# Altium PCB AC to DC(12V).PcbDoc
Units mil, origin at the board's own origin, x right, y up, seen from the top; angles counter-clockwise.
Board outline 3210 x 4000 mil, 4 copper layers (Top Layer, Layer 1, Layer 2, Bottom Layer), stack 23.756 mil thick; 33 components, 22 nets, 87 pads, 0 vias.
Unrouted connection lines stored in the file: 3.
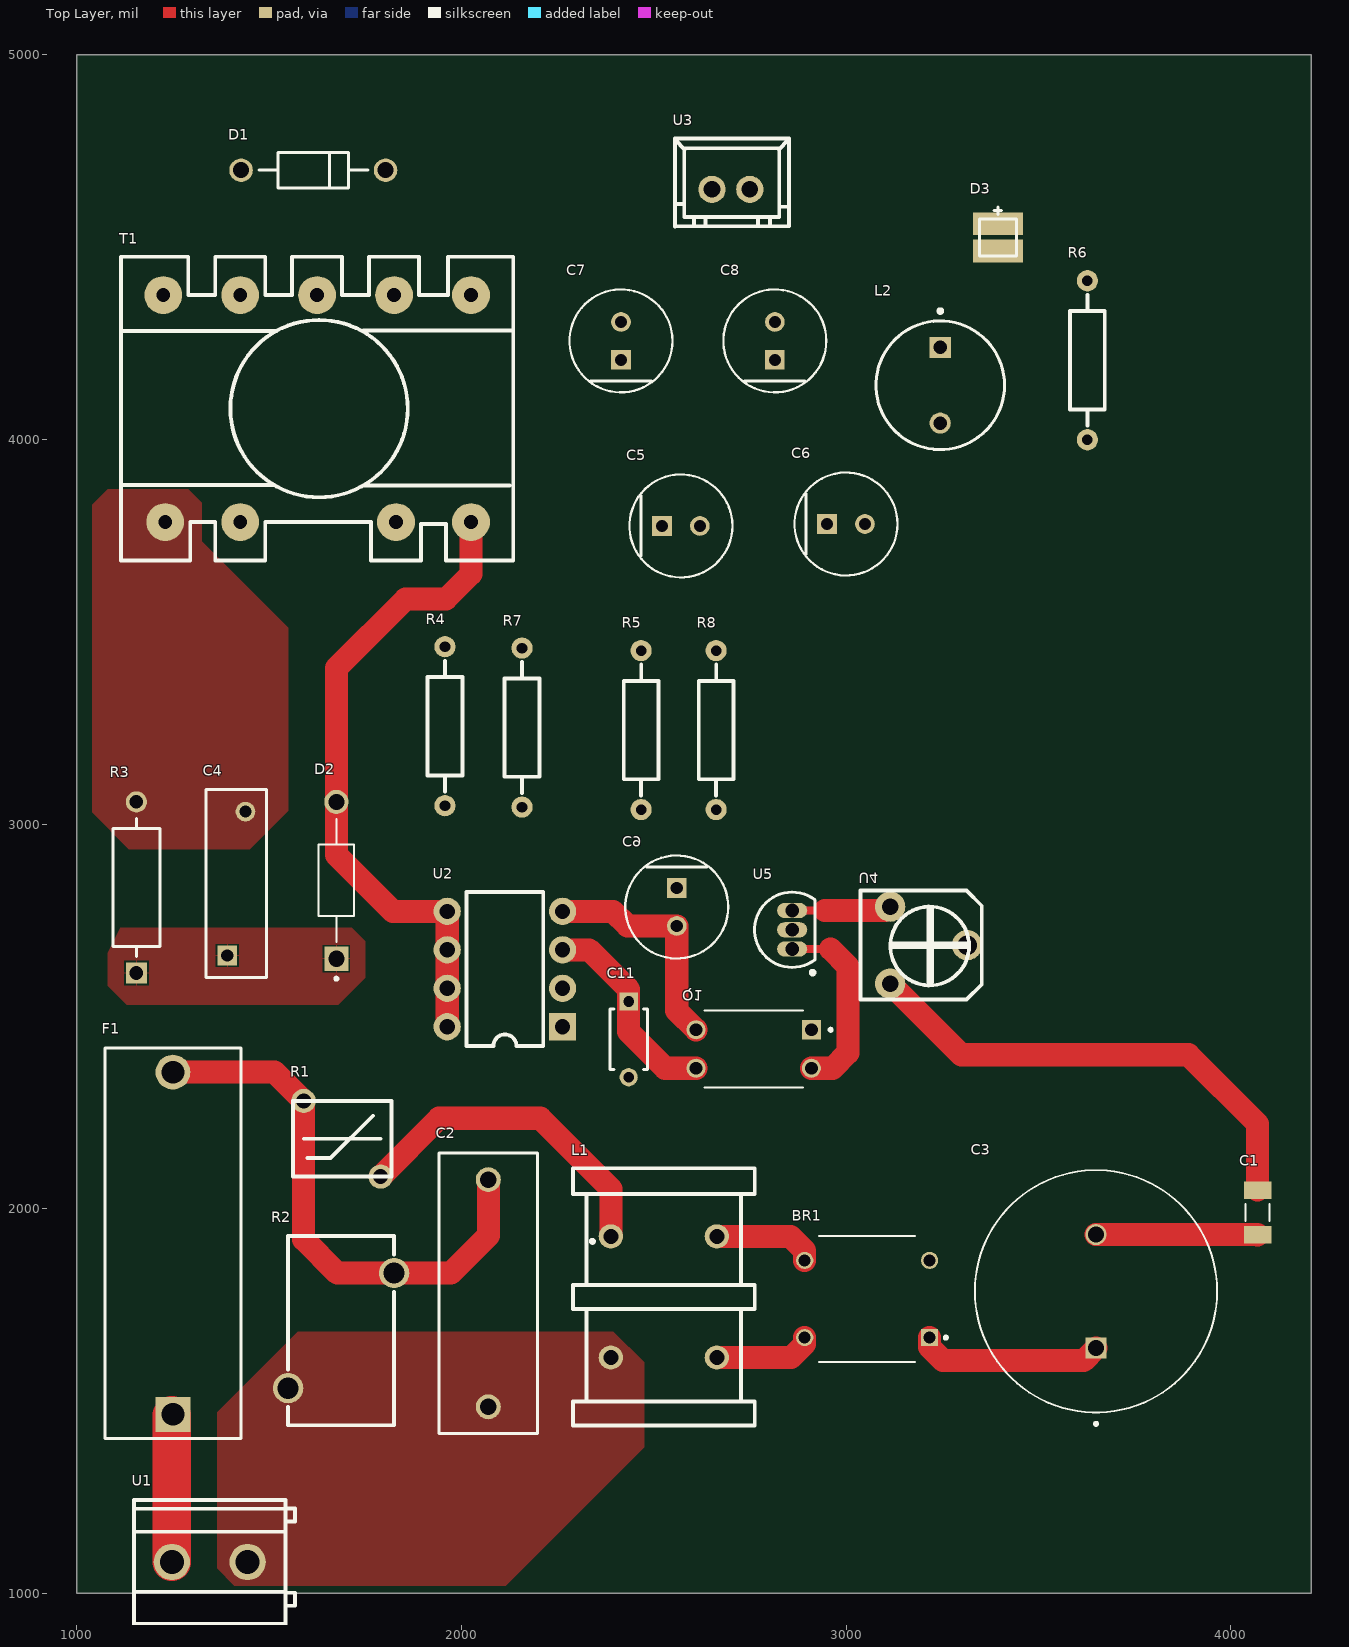
[diagram p0: Top Layer view]
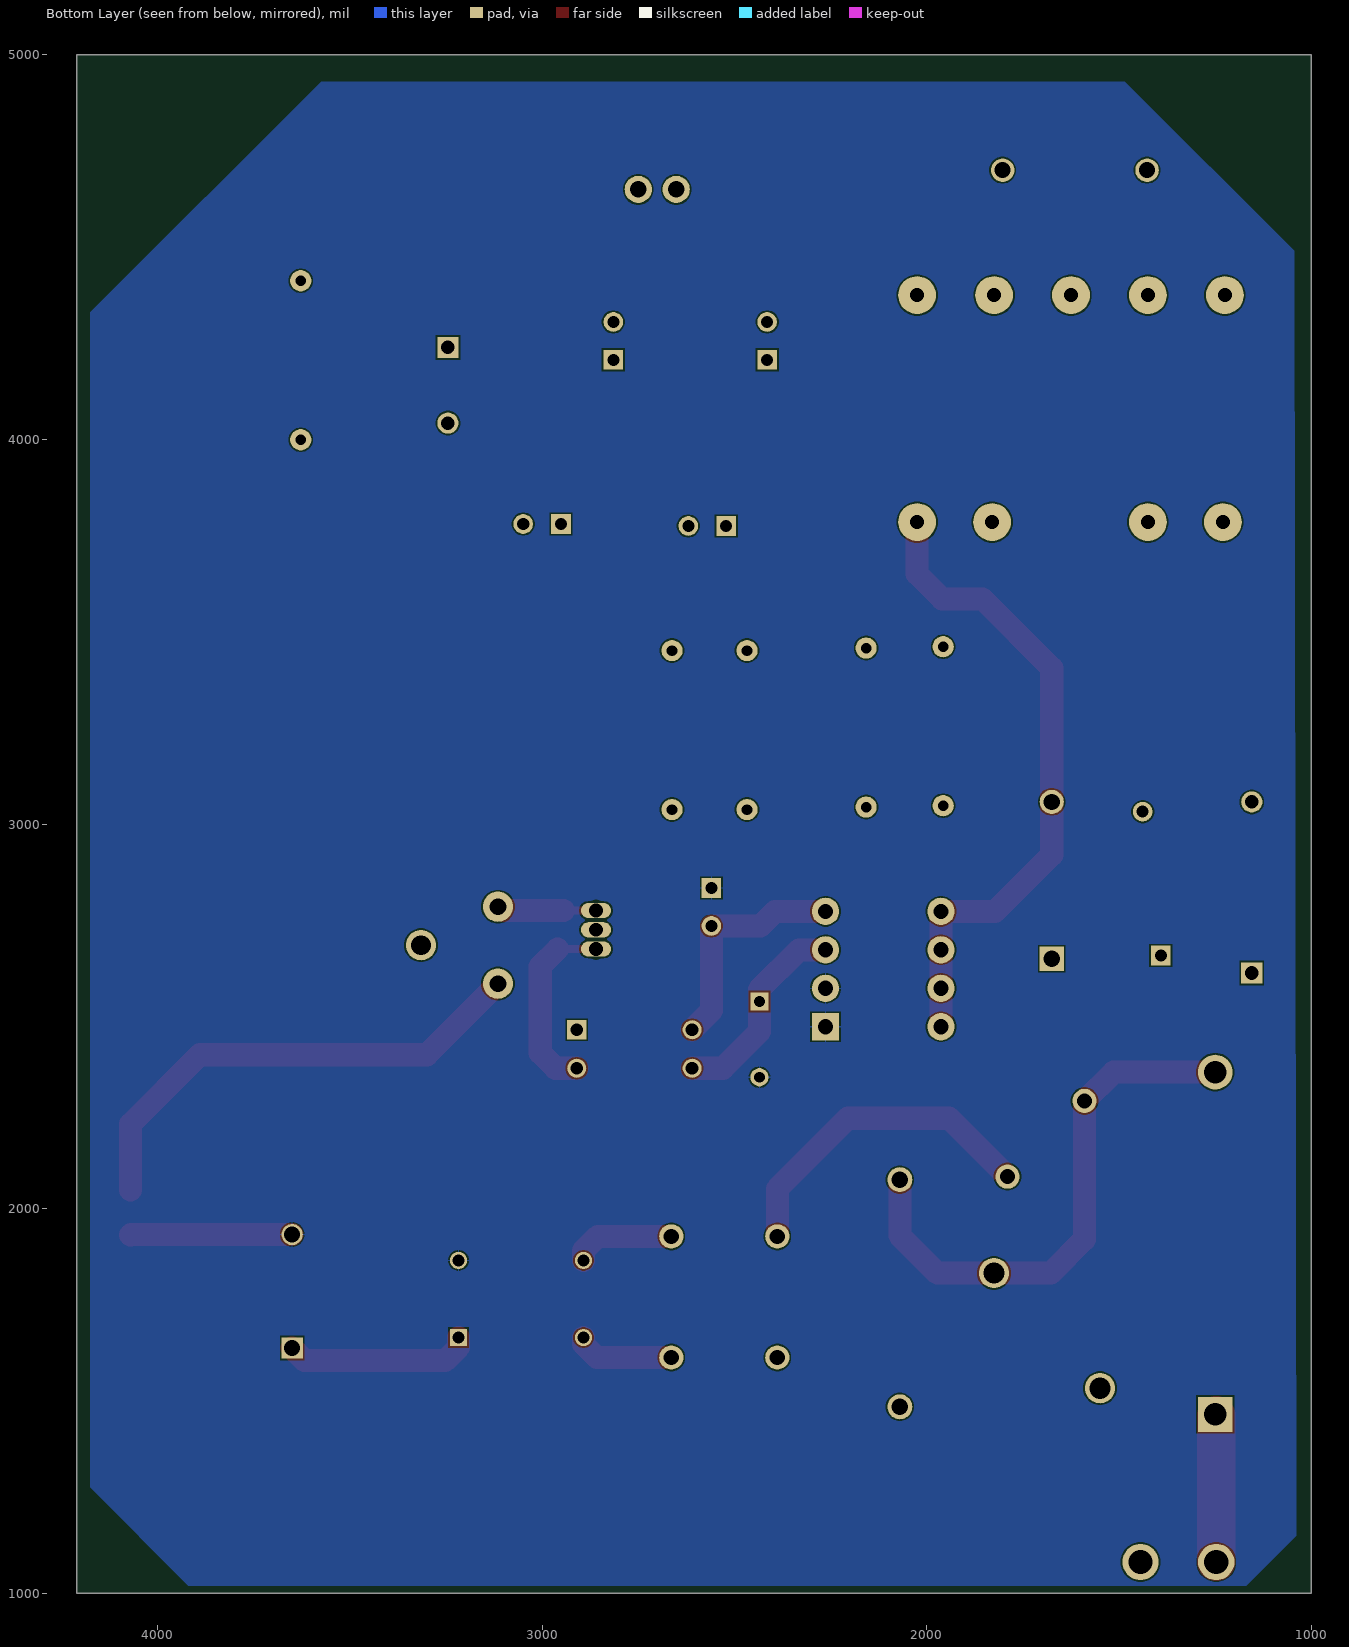
[diagram p1: Bottom Layer view, seen from below]
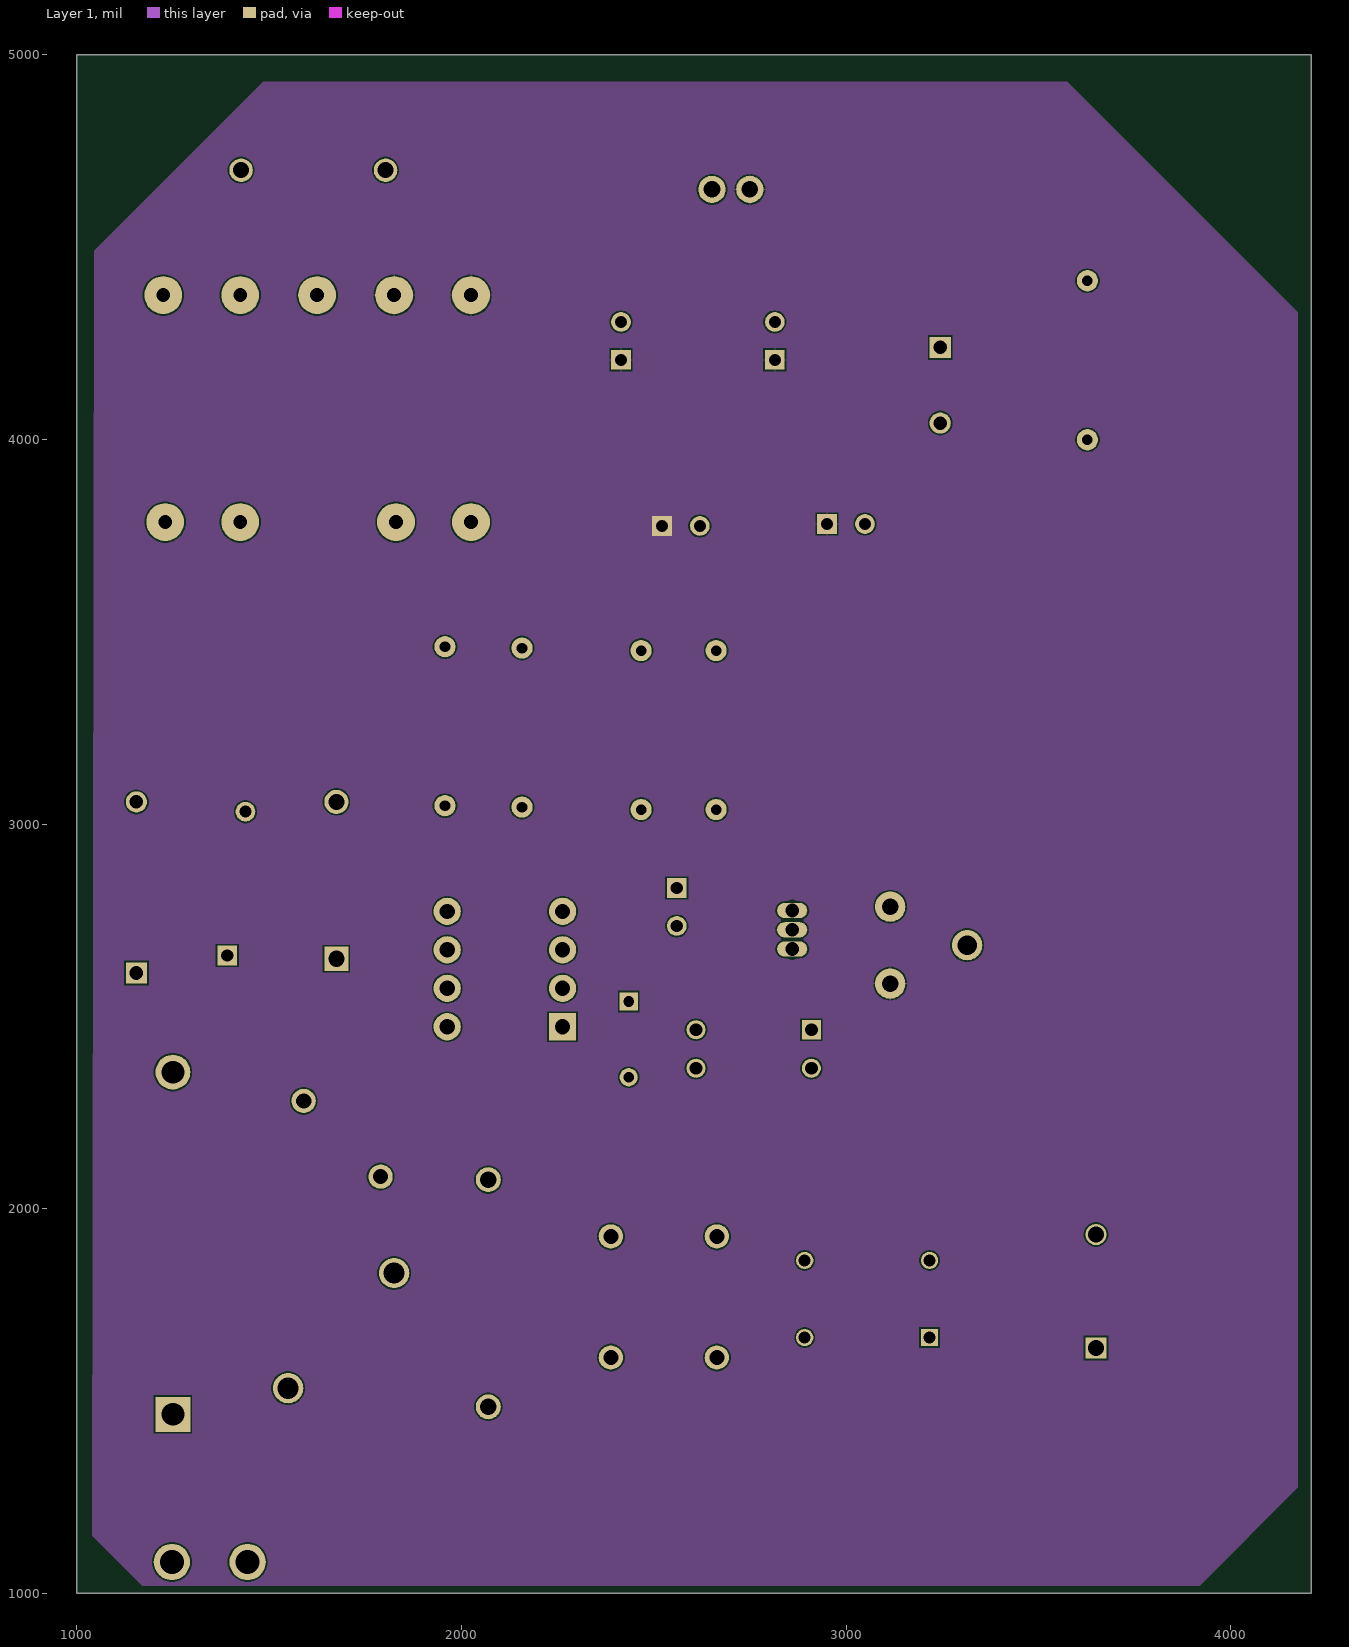
[diagram p2: Layer 1]
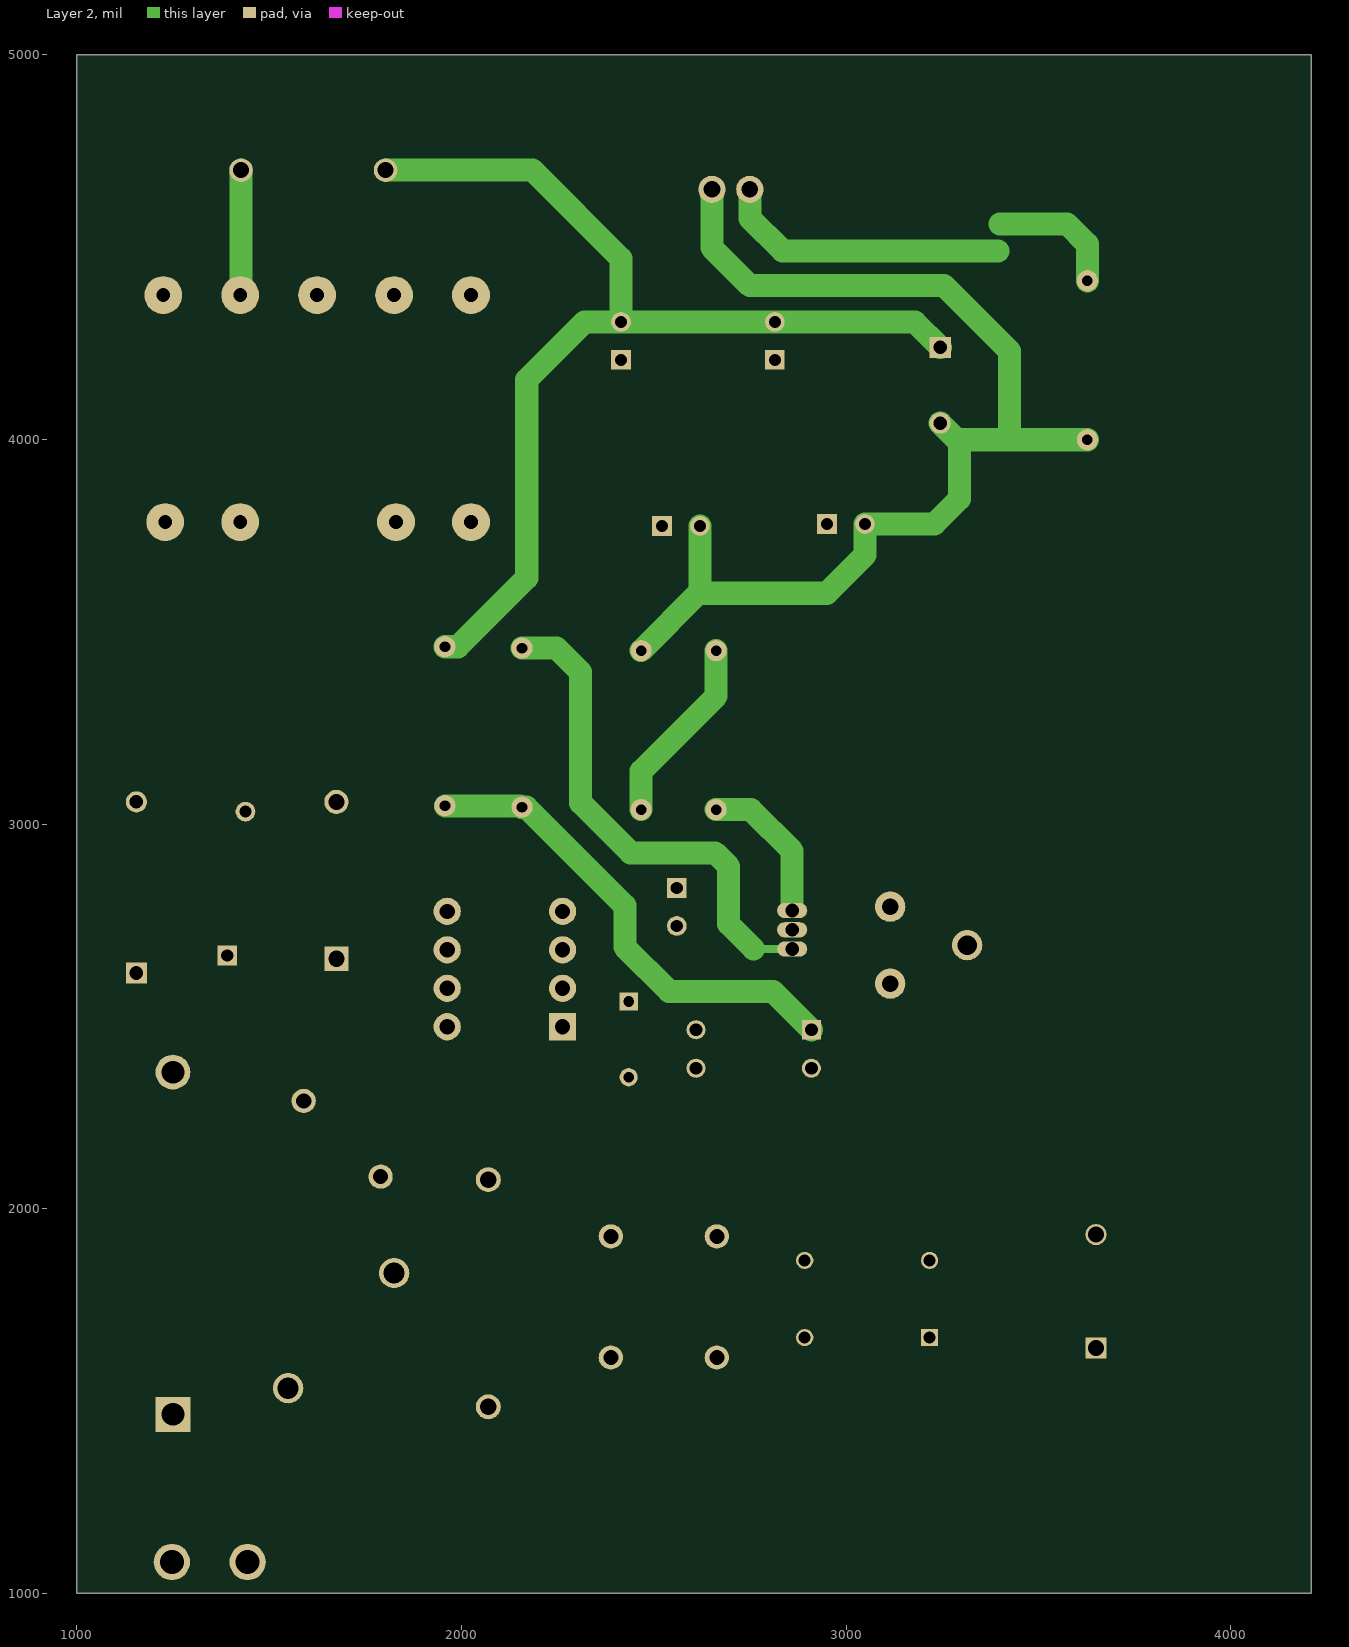
[diagram p3: Layer 2]
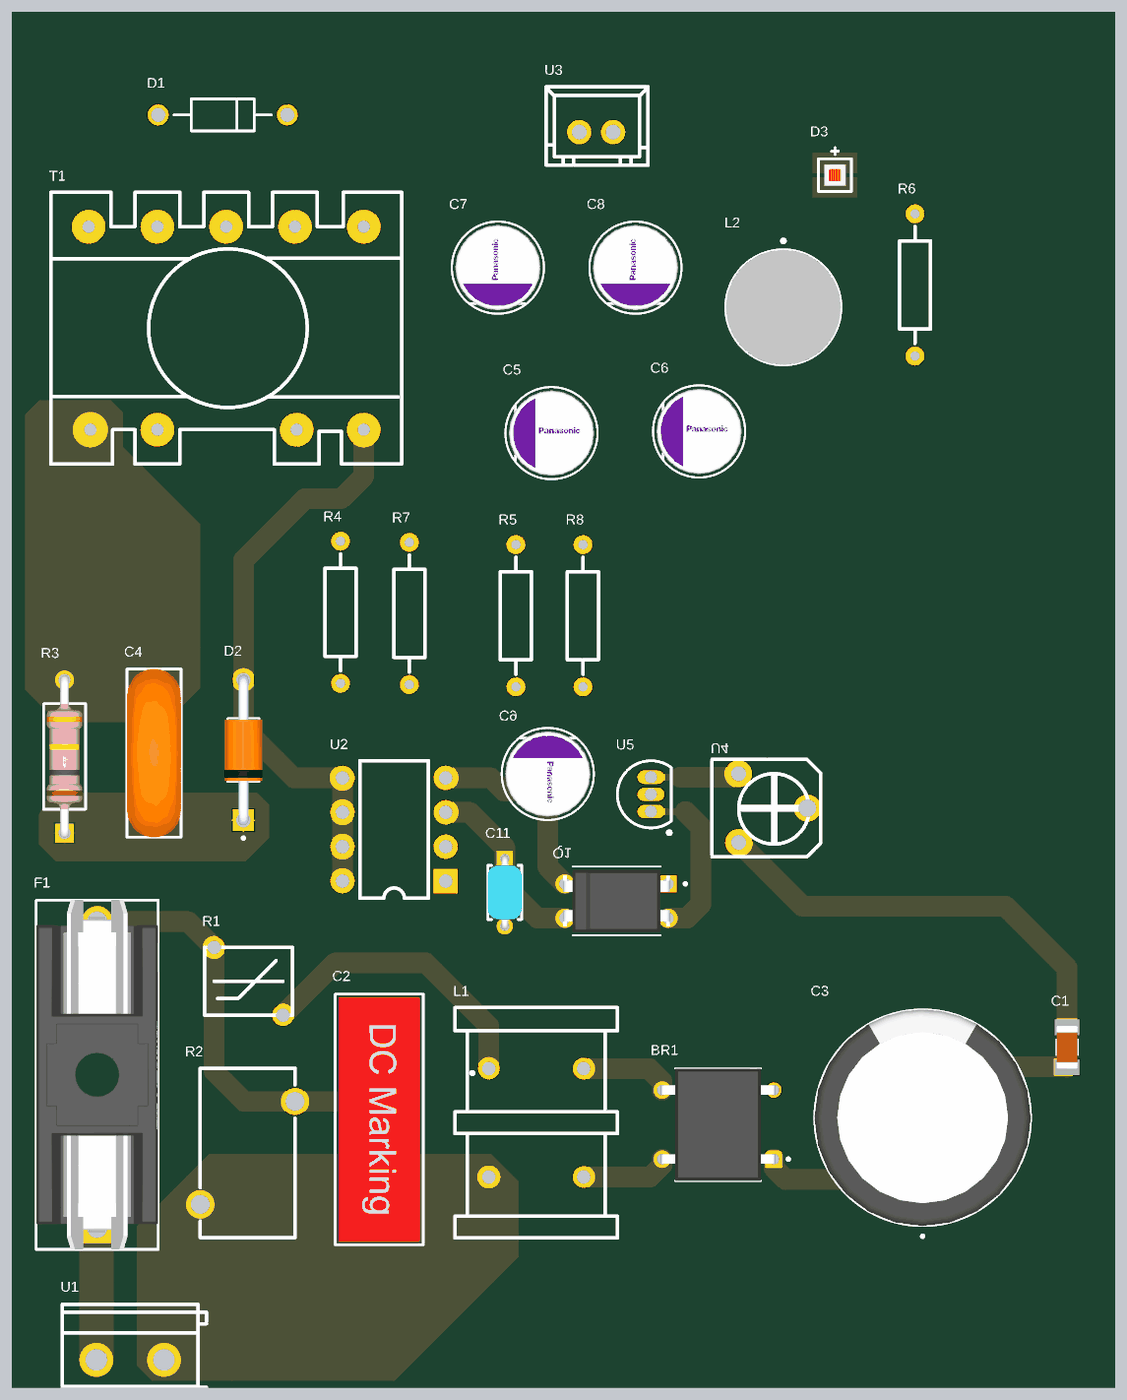
[diagram p4: 3D render of the assembled board from above, using the file's embedded part models]

## Layer stack, top to bottom
Top Solder: solder mask 0.4, Solder Resist, Dk 3.5
Top Layer: signal copper 1.4
Dielectric 2: prepreg 2.8, PP-006, Dk 4.1
Layer 1: signal copper 1.378
Dielectric 1: dielectric 12.6, FR-4, Dk 4.8
Layer 2: signal copper 1.378
Dielectric 3: prepreg 2.8, PP-006, Dk 4.1
Bottom Layer: signal copper 1.4
Bottom Solder: solder mask 0.4, Solder Resist, Dk 3.5

## Board outline
1000,1000 4210,1000 4210,5000 1000,5000

## Design rules (kind name [scope] priority, off if disabled: settings)
BoardOutlineClearance [All] p1: gap=7.87 ignorepadtopadclearanceinfootprint=FALSE
Clearance [All] p1: gap=4 ignorepadtopadclearanceinfootprint=FALSE except(5: Arc-Via Track-Via SMDPad-Via THPad-Via Via-Via Via-Fill Via-Poly Via-Region Via-Text; 9.84: Arc-Hole Track-Hole SMDPad-Hole THPad-Hole Via-Hole Fill-Hole Poly-Hole Region-Hole Text-Hole)
ComponentClearance [All] p1: gap=4 collisioncheckmode=3 verticalgap=4 showdistances=TRUE
DiffPairsRouting [All] p1: maxlimit=4 minlimit=4 mostfreqgap=4 toplayer_minwidth=4 toplayer_maxwidth=71497.94 toplayer_prefwidth=4 midlayer1_minwidth=4 midlayer1_maxwidth=71497.94 midlayer1_prefwidth=4 midlayer2_minwidth=4 midlayer2_maxwidth=71497.94 midlayer2_prefwidth=4 bottomlayer_minwidth=4 bottomlayer_maxwidth=71497.94 bottomlayer_prefwidth=4 maxuncoupledlength=500
Height [All] p1: minheight=0 maxheight=71497.94 prefheight=500
HoleSize [All] p1: absolutevalues=TRUE maxlimit=248.03 minlimit=7.87 maxpercent=80.000 minpercent=20.000
HoleToHoleClearance [All] p1: gap=9.84 allowstackedmicrovias=FALSE
MinimumAnnularRing [All] p1: minimumring=3
MinimumSolderMaskSliver [All] p1: minsoldermaskwidth=0
PlaneClearance [All] p1: clearance=4
PlaneConnect PlaneConnectPowerPads [InPadClass('PowerPads')] p1: planeconnectstyle=Direct reliefexpansion=20 reliefentries=4 reliefconductorwidth=10 reliefairgap=10
PlaneConnect [All] p2: pad.planeconnectstyle=Relief pad.reliefexpansion=11.81 pad.reliefentries=4 pad.reliefconductorwidth=4 pad.reliefairgap=4 via.planeconnectstyle=Direct via.reliefexpansion=11.81 via.reliefentries=4 via.reliefconductorwidth=5 via.reliefairgap=5
PolygonConnect PolygonConnectPowerPads [All vs (InPadClass('PowerPads'))] p1: connectstyle=Direct reliefconductorwidth=10 reliefentries=4 polygonreliefangle="90 Angle" airgapwidth=10
PolygonConnect [All] p2: thpad.connectstyle=Relief thpad.reliefconductorwidth=4 thpad.reliefentries=4 thpad.polygonreliefangle="90 Angle" thpad.airgapwidth=4 smdpad.connectstyle=Relief smdpad.reliefconductorwidth=4 smdpad.reliefentries=4 smdpad.polygonreliefangle="90 Angle" smdpad.airgapwidth=4 via.connectstyle=Direct via.reliefconductorwidth=5 via.reliefentries=4 via.polygonreliefangle="90 Angle" via.airgapwidth=5
RoutingVias [All] p1: holewidth=7.87 width=17.72 viastyle="Through Hole" minholewidth=7.87 minwidth=17.72 maxholewidth=248.03 maxwidth=257.87
SilkToSilkClearance [All] p1: silktosilkclearance=0
SilkToSolderMaskClearance [IsPad] p1: minsilkscreentomaskgap=4 clearancetoexposedcopper=TRUE
SolderMaskExpansion [All] p1: expansion=2.95 istentingtop=FALSE
Width [All] p1: maxlimit=71497.94 minlimit=4 preferedwidth=4
20 further rules are at their usual default settings.

## Components (designator, comment, footprint, x,y, rotation, side; value= is the part's Value field where it differs from the comment)
BR1 "DB107-BP" DIP825W50P509L880H320Q4 3055,1765 r180 top
C1 "2200pF  (1kV)" CAPC3216X94N 4070,1990 r90 top
C2 "100nF 275Vac" WCAP-FTX2_L18W6H12_CS 2070,1780 r270 top
C3 "22uF 450V" CAPPRD750W80D1600H2500 3650,1785 r90 top
C4 "10000PF 1KV" FP-562R5GAS10-MFG 1415,2845 r90 top
C5 "100UF 16V" FP-OS-CON-TH-C9-d_0_6-MFG 2570.79,3775 r0 top
C6 "100UF 16V" FP-OS-CON-TH-C9-d_0_6-MFG 3000,3780 r0 top
C7 "100UF 16V" FP-OS-CON-TH-C9-d_0_6-MFG 2415,4256.02 r90 top
C8 "100UF 16V" FP-OS-CON-TH-C9-d_0_6-MFG 2815,4256.02 r90 top
C9 "100UF 16V" FP-OS-CON-TH-C9-d_0_6-MFG 2560,2784.21 r270 top
C10 "0.1uF 50V" WCAP-ATG8_D5H11 0,2290 r0 top
C11 "10nF 50V\" FP-RCE1K1-2_5-MFG 2435,2440 r270 top
D1 "MBR160RLG" ONSC-AXIAL_LEAD-2-59-10_P 1615,4700 r180 top
D2 "FR107G" DIOAD1036W78L470D235 1675,2853.64 r90 top
D3 "XQERED-H2-0000-000000301" FP-XQE-MFG 3395,4525 r90 top
F1 "64600001223" FP-64600001223-MFG 1250,1910 r90 top
L1 "UU9.8-10mH" "CMC 10mH" 2530,1770 r180 top
L2 "RL622-100K-RC" INDR62-500-1100X850X1100 3245,4140.76 r270 top
Q1 "PC817C" DIP762W50P254L650H458Q4B 2760,2415 r180 top
R1 "MF72 10D7_C72680" "NTC thermistor" 1559.69,2061.66 r0 top value=Power
R2 "10D561K_C233178" varistor 1690,1685 r270 top value=Shenzhen
R3 "100K OHM 1W" FP-RR01-MFG 1155,2835 r90 top
R4 "2.2KΩ" CF1/4W-2.2K 1965,3240 r90 top value=2.2kΩ
R5 "18KΩ" CF1/4W-2.2K 2475,3230 r90 top value=2.2kΩ
R6 "CF1/4W-1.5KΩ" CF1/4W-2.2K 3620,4220 r270 top value=2.2kΩ
R7 "4.7KΩ" CF1/4W-2.2K 2150,3265 r270 top value=2.2kΩ
R8 "3.9KΩ" CF1/4W-2.2K 2670,3230 r90 top value=2.2kΩ
T1 "EE25" EE25 1640,4085 r90 top
U1 "Green Connector-2P" KF127-5.0-2P 1340,1090 r180 top
U2 "DK124" "AC-DC controller" 2100,2627.87 r90 top
U3 "XH-2PA" "XH-2PA white connector" 2710.75,4726.57 r0 top
U4 "Trimmer(1K)" "trimmer 1K" 3042.83,2543.27 r90 top value=1kΩ
U5 "TL431CZ-AP" TO-92 2860,2725 r0 top

## Footprints (in the part's own frame and the unit in brackets; to place one, negate y for a bottom-side part, rotate by r counter-clockwise, add the part's x,y. Pads: shape width x height; smd on the part's side, far side on the other; paste and mask are expansions set on the pad)
"AC-DC controller" [mm]
  rect 1.8x1.8 hole 1 paste-2539.97 mask+0.05: 1(-3.937,-4.145)
  round 1.8 hole 1 paste-2539.97 mask+0.05: 2(-1.397,-4.145) 3(1.143,-4.145) 4(3.683,-4.145) 5(3.683,3.475) 6(1.143,3.475) 7(-1.397,3.475) 8(-3.937,3.475)
  silkscreen extent -5.21,-2.87 4.95,2.2
CAPC3216X94N [mm]
  rect 1.16x1.82 smd: 1(-1.475,0) 2(1.475,0)
  silkscreen extent -0.57,-0.8 0.57,0.8, body extent -1.6,-0.8 1.6,0.8, height 1.78
CAPPRD750W80D1600H2500 [mm]
  round 1.4 hole 1.05: N(3.75,0)
  rect 1.4x1.4 hole 1.05: P(-3.75,0)
  silkscreen extent -8.85,-8 8,8, body extent -8,-8 8,8, height 25
CF1/4W-2.2K [mm]
  round 1.4 hole 0.7 paste-2539.97 mask+0.051: 1(-4.888,0.194) 2(5.612,0.194)
  silkscreen extent -3.96,-0.96 4.68,1.34
"CMC 10mH" [mm]
  round 1.6 hole 1 paste-2539.97 mask+0.051: 1(3.591,-4.009) 2(-3.409,-4.009) 3(-3.409,3.991) 4(3.591,3.991)
  silkscreen extent -5.91,-8.51 6.09,8.49
DIOAD1036W78L470D235 [mm]
  round 1.59 hole 1.06: A(5.18,0)
  rect 1.59x1.59 hole 1.06: C(-5.18,0)
  silkscreen extent -6.6,-1.17 4.07,1.17, body extent -5.55,-1.4 5.55,1.4, height 2.8
DIP762W50P254L650H458Q4B [mm]
  rect 1.26x1.26 hole 0.85: 1(-3.81,-1.27)
  round 1.26 hole 0.85: 2(-3.81,1.27) 3(3.81,1.27) 4(3.81,-1.27)
  silkscreen extent -5.18,-2.54 3.25,2.54, body extent -3.94,-2.29 3.94,2.29, height 4.8
DIP825W50P509L880H320Q4 [mm]
  rect 1.14x1.14 hole 0.79: 1(-4.125,2.55)
  round 1.14 hole 0.79: 2(-4.125,-2.55) 3(4.125,-2.55) 4(4.125,2.55)
  silkscreen extent -5.3,-4.15 3.18,4.15, body extent -4.2,-4.14 4.2,4.14, height 3.3
EE25 [mil]
  round 98.42 hole 36 paste-99999 mask+2: 1(-300,-385) 2(-300,-190) 3(-300,215) 4(-300,410) 5(290,-385) 6(290,-185) 7(290,15) 8(290,215) 9(290,415)
  silkscreen extent -400,-495 390,525
FP-562R5GAS10-MFG [mm]
  rect 1.3x1.3 hole 0.8 paste-2539.97 mask+0: 1(-4.75,0.6)
  round 1.3 hole 0.8 paste-2539.97 mask+0: 2(4.75,-0.6)
  silkscreen extent -6.2,-2 6.2,2, body extent -6.3,-2.1 6.3,2.1, height 0.25
FP-64600001223-MFG [mm]
  rect 2.3x2.3 hole 1.5 paste-2539.97 mask+0: 1(-11.3,0)
  round 2.3 hole 1.5 paste-2539.97 mask+0: 2(11.3,0)
  silkscreen extent -12.9,-4.5 12.9,4.5, body extent -13,-4.6 13,4.6, height 0.25
FP-OS-CON-TH-C9-d_0_6-MFG [mm]
  rect 1.3x1.3 hole 0.8 paste-2539.97 mask+0: 1(-1.25,0)
  round 1.3 hole 0.8 paste-2539.97 mask+0: 2(1.25,0)
  silkscreen extent -3.4,-3.4 3.4,3.4, body extent -3.5,-3.5 3.5,3.5, height 0.25
FP-RCE1K1-2_5-MFG [mm]
  rect 1.2x1.2 hole 0.7 paste-2539.97 mask+0: 1(-2.5,0)
  round 1.2 hole 0.7 paste-2539.97 mask+0: 2(2.5,0)
  silkscreen extent -2,-1.25 2,1.25, body extent -3.2,-1.35 3.2,1.35, height 0.25
FP-RR01-MFG [mm]
  rect 1.4x1.4 hole 0.9 paste-2539.97 mask+0: 1(-5.65,0)
  round 1.4 hole 0.9 paste-2539.97 mask+0: 2(5.65,0)
  silkscreen extent -4.55,-1.55 4.55,1.55, body extent -6.45,-1.65 6.45,1.65, height 0.25
FP-XQE-MFG [mm]
  rect 1.5x3.3 smd paste-1000 mask-1000: 1(-0.9,0) 2(0.9,0)
  silkscreen extent -1.21,-1.21 2.02,1.21, body extent -1.75,-1.75 1.75,1.75, height 0.25
INDR62-500-1100X850X1100 [mm] "THD, 2-Leads, Dia 8.5mm, Pitch 5mm"
  rect 1.4x1.4 hole 0.9 unplated: 1(-2.5,0)
  round 1.4 hole 0.9 unplated: 2(2.5,0)
  silkscreen extent -5.02,-4.25 4.25,4.25, body extent -4.25,-4.25 4.25,4.25, height 11
KF127-5.0-2P [mm]
  round 2.4 hole 1.6 paste-2539.97 mask+0.051: 1(-2.647,0.223) 2(2.353,0.223)
  silkscreen extent -5.78,-3.88 4.85,4.32
"NTC thermistor" [mm]
  round 1.6 hole 1 paste-2539.97 mask+0.051: 1(0.77,5.546) 2(5.85,0.546)
  silkscreen extent 0.06,0.55 6.56,5.55
ONSC-AXIAL_LEAD-2-59-10_P [mm] "AXIAL, 2-Leads, Diameter 2.35mm"
  round 1.55 hole 1.05: 1(-4.77,0) 2(4.77,0)
  silkscreen extent -3.59,-1.17 3.59,1.17
TO-92 [mm] "TO, Flat Index; 3 In-Line, Axial Leads; Body Dia. 4.7mm; Lead Dia. 0.56 mm (max)"
  oval 2x1 hole 0.9: 1(0,-1.27) 2(0,0) 3(0,1.27)
  silkscreen extent -2.48,-2.95 1.5,2.48, body extent -2.48,-2.5 1.5,2.5, height 4.95
"trimmer 1K" [mm]
  round 2 hole 1.1 paste-2539.97 mask+0.051: 1(1.06,-1.833) 3(6.14,-1.833)
  round 2 hole 1.3 paste-2539.97 mask+0.051: 2(3.6,-6.913)
  silkscreen extent 0,-7.87 7.2,0.13
varistor [mm]
  round 2 hole 1.4 paste-2539.97 mask+0.051: 1(3.857,-3.567) 2(-3.743,3.433)
  silkscreen extent -6.19,-3.57 6.31,3.43
WCAP-ATG8_D5H11 [mm] "Aluminum Electrolytic Capacitors, 5x11mm"
  rrect50% 1.3x1.3 hole 0.8: 1(-1269,-1270)
  round 1.3 hole 0.8: 2(-1271,-1270)
  silkscreen extent -1272.75,-1272.75 -1267.25,-1267.25, body extent -1272.49,-1272.5 -1267.5,-1267.5, height 11.31
WCAP-FTX2_L18W6H12_CS [mm] "Film Capacitors, 18x6x12mm"
  round 1.65 hole 1.1: 1(-7.5,0) 2(7.5,0)
  silkscreen extent -9.25,-3.25 9.25,3.25, body extent -9,-3 9,3, height 12.05
"XH-2PA white connector" [mm]
  round 1.8 hole 1.1 paste-2539.97 mask+0.051: 1(-1.505,-1.945) 2(0.997,-1.945)
  silkscreen extent -3.94,-4.39 3.58,1.41

## Part data
BR1 D2: Package=None, Availability=Unavailable, Price=None
  BR1: MF="{'manufacturer': u'Micro Commercial Components'}", MP=DB107-BP
  D2: MF="{'manufacturer': u'Taiwan Semiconductor'}", MP=FR107G
C1: library part 1206AC222KAT1A, "2200pF Â±10% 1000V (1kV) Ceramic Capacitor X7R 1206 (3216 Metric)", Package=None, Availability=Unavailable, MF="{'manufacturer': u'AVX'}", MP=1206AC222KAT1A, Price=None
C2: library part CMP-03913-51400111-2, "890324025017CS WCAP-FTX2 Film Capacitor 100nF 275Vac", Capacitance=100nF, Case/Package=Radial, Dielectric=PP, Insulation Resistance=30GΩ, Max Operating Temperature=105°C, Min Operating Temperature=-40°C, Tolerance=10%, Voltage Rating=275V, Dielectric Material=PP, Height=12mm, Height - Seated (Max)=12.4968mm, Hole Diameter=1.1mm, Lead Pitch=15.0114mm, Length=18mm, Mount="Through Hole", NexarPartId=51400111, Packaging=Carton, Pin Length=4mm, Pitch=15mm, REACH SVHC=Unknown, RoHS=Compliant, Termination="PC Pins", Voltage Rating (AC)=275V, Voltage Rating (DC)=275V, Width=6mm
C3: library part ECA2WHG220, "Cap Aluminum 22uF 450V 20% (16 X 25mm) Radial Aluminum Cylindrical Can 7.5mm 115mA 2000 hr 105C Bulk", Package="RADIAL-2 Panasonic", Availability="In Stock", Check_prices=https://www.snapeda.com/parts/ECA-2WHG220/Panasonic/view-part/390097/?ref=eda, MF=Panasonic, MP=ECA-2WHG220, Price=None, SnapEDA_Link=https://www.snapeda.com/parts/ECA-2WHG220/Panasonic/view-part/390097/?ref=snap
C4: library part CMP-02417-000061-1, "CAP CER 10000PF 1KV Z5U RADIAL", Capacitance=10nF, Case/Package=Radial, Dielectric=Z5U, Max Operating Temperature=105°C, Min Operating Temperature=-55°C, Package Quantity=250, Resistor Type=Ceramic, Tolerance=20%, Voltage=1kV, Application(s)="GENERAL PURPOSE", Construction=RADIAL, Contact Plating=Tin, Depth=4mm, Diameter=12.4mm, Dissipation Factor=2.5%, Height=0.25inch, Height - Seated (Max)=0.613inch, Lead Diameter=0.64mm, Lead Free="Lead Free", Lead Length=29mm, Lead Pitch=9.5mm, Lead/Base Style=Straight, Length=2inch, Mount="Through Hole", Packaging=Bulk, Radiation Hardening=No, RoHS Compliant=Yes, Series="Cera-Mite 562R", Termination=Radial, Voltage Rating=1kV, Voltage Rating (DC)=1kV, Weight=0.01lb, Width=4mm
C5 C6 C7 C8 C9: library part CMP-05428-000281-1, "CAP ALUM POLY 100UF 20% 16V T/H", Capacitance=100uF, Case/Package=Radial, ESR (Equivalent Series Resistance)=10mR, Leakage Current=500uA, Max Operating Temperature=105°C, Min Operating Temperature=-55°C, Package Quantity=500, Ripple Current=4.68A, Tolerance=20%, Voltage Rating=16V, Diameter=6.3mm, Dissipation Factor=10%, Height=9mm, Height - Seated (Max)=0.354inch, Lead Diameter=0.6mm, Lead Free="Lead Free", Lead Pitch=2.5mm, Length=9mm, Life (Hours)=2000Hour, Mount="Through Hole", Packaging=Bulk, Polarity=Polar, Radiation Hardening=No, REACH SVHC="No SVHC", RoHS Compliant=Yes, Series="OS-CON, SEPC", Termination=Radial, Voltage Rating (DC)=16V
C10: library part CMP-03913-54007254-1, "860010672001 Cap Aluminum Lytic 0.1uF 50V 20% (5 X 11mm) Radial 2mm 3.3mA 2000h 85C", Capacitance=100nF, Case/Package=Radial, Leakage Current=3µA, Max Operating Temperature=85°C, Min Operating Temperature=-40°C, Ripple Current=3.3mA, Tolerance=20%, Voltage Rating=50V, Diameter=5mm, Height=11mm, Height - Seated (Max)=12.4968mm, Lead Pitch=2.0066mm, Length=11mm, Life (Hours)=2000hours, Material=Aluminium, Mount="Through Hole", NexarPartId=54007254, Packaging="Tape & Box (TB)", Pitch=2mm, Polarity=Polar, REACH SVHC=Unknown, RoHS=Compliant, Voltage Rating (DC)=50V
C11: library part CMP-06035-061841-1, "Cap Ceramic Monolithic 10nF 50V 5% Thru-Hole Bulk", Capacitance=10nF, Case/Package=Radial, Dielectric=C0G, Max Operating Temperature=125°C, Min Operating Temperature=-55°C, Package Quantity=2000, Ratings=AEC-Q200, Resistor Type=Ceramic, Tolerance=5%, Voltage=50V, Depth=2.5mm, Height=3.5mm, Height - Seated (Max)=0.138inch, Lead Diameter=0.5mm, Lead Pitch=0.197inch, Lead/Base Style="Formed Leads", Length=4mm, Mount="Through Hole", Packaging="Tape and Reel", RoHS Compliant=Yes, Termination=Radial, Voltage Rating=50V, Voltage Rating (DC)=50V, Width=0.098inch
D1: library part CMP-1055-00054-1, "Rectifier, 2-Pin Axial_Lead, Pb-Free, Tape and Reel", Manufacturer="On Semiconductor", ComponentLink1Description="Manufacturer URL", ComponentLink1URL=http://www.onsemi.com/, ComponentLink2Description=Datasheet, ComponentLink2URL=http://www.onsemi.cn/pub_link/Collateral/MBR150-D.PDF, ComponentLink3Description="Package Specification", ComponentLink3URL=http://www.onsemi.cn/pub_link/Collateral/59-10.PDF, Configuration=Single, DatasheetVersion="Rev. 8", IFSM Max (A)=25, Mounting Technology="Through Hole", PackageDescription="2-Pin, Axial Lead, Diameter 2.35 mm", PackageReference=AXIAL_LEAD-2-59-10, PackageVersion="Rev. U, 02/2005", Packing="Tape and Reel", PartNumber=MBR160RLG, RoHS=TRUE
D3: library part CMP-13977-000012-1, "LED XLAMP RED 620NM 1616 SMD", Colour=Red, Forward Current=350mA, Forward Voltage=2.2V, Manufacturer="Cree Inc.", Max Junction Temp=+150°C, Package=XQE, Reverse Voltage=5V, Temperature="to +150°C", Automotive=No, Category=Diode, ComponentLink2Description=Datasheet, ComponentLink2URL=https://www.cree.com/led-components/media/documents/ds-XQE.pdf, Device Class L1=Optoelectronics, Device Class L2=LEDs, Device Class L3=unset, Digikey Description="LED XLAMP RED 620NM 1616 SMD", Height=0.9mm, Lead Free=Yes, Led Orientation="Top View", Luminous Flux=45.7lm, Manufacturer Part Number=XQERED-H2-0000-000000301, Mouser Description="High Power LEDs - Single Color Red 45.7lm", Octopart=https://octopart.com/xqered-h2-0000-000000301-cree-65034092, RoHS=TRUE, Temperature Range High=+150°C, Viewing Angle=125°, Wavelength=630nm
F1: library part CMP-08604-000020-1, "FUSE BLOCK CART 250V 6.3A PCB", Fuse Current=6.3A, Manufacturer="Littelfuse Inc", Package=0, Voltage Rating Ac=250V, Automotive=No, Category=Fuse, ComponentLink2Description=Datasheet, ComponentLink2URL=https://www.littelfuse.com/~/media/electronics/datasheets/fuse_blocks/littelfuse_fuse_block_646_datasheet.pdf.pdf, Conn Orientation=Horizontal, Device Class L1="Circuit Protection", Device Class L2="Fuse Holders", Device Class L3=unset, Digikey Description="FUSE BLOCK CART 250V 6.3A PCB", Height=12mm, Lead Free=Yes, Manufacturer Part Number=64600001223, Mouser Description="Fuse Holder Screw Mount Bulk", Number Of Fuses=1, Octopart=https://octopart.com/64600001223-littelfuse-39645661, RoHS=TRUE, Voltage Rating Dc=250V
L1: Current Rating=-, DC Resistance (DCR)=800mΩ, Inductance @ Frequency=10mH@1kHz, JLCPCB Part Class="Extended Part", LCSC Part Name="两路 插件共模滤波器", Manufacturer=FH(风华), Withstanding Voltage=1kV, Add into BOM=yes, Convert to PCB=yes, Datasheet=https://atta.szlcsc.com/upload/public/pdf/source/20210713/C148474_656501625637B4BA0D3972AB204D3908.pdf, Device=UU9.8-10mH, Impedance @ Frequency=-, Manufacturer Part=UU9.8-10mH, Number of Lines=2, Operating Temperature=-, Supplier=LCSC, Supplier Footprint=插件, Supplier Part=C148474, Symbol=UU9.8-10MH, Voltage Rating=-, Voltage Rating - DC=-
L2: library part CMP-1747-00016-1, "Radial Inductor, 10 uH, +/- 10%, 3 A, -55 to 105 degC, 2-Pin THD, RoHS, Bulk", Case\Package=DIP, Max Operating Temperature="70 degC", Max Supply Voltage="36 V", Min Operating Temperature="0 degC", Min Supply Voltage="4.5 V", Output Current="600 mA", Package Quantity=25, ComponentLink1Description="Manufacturer URL", ComponentLink1URL=http://www.bourns.com/, ComponentLink2Description=Datasheet, ComponentLink2URL=http://www.bourns.com/docs/Product-Datasheets/rl622_series.pdf, DatasheetVersion=Aug-10, Height="0.25 inch", Interface=Parallel, Length="0.75 inch", Mount="Through Hole", Output Voltage="36 V", Outputs=4, PackageDescription="2-Pin Radial Lead, Dia 8.5 mm, Pitch 5 mm", PackageReference=INDR62-500-1100X850X1100, Packaging=Rail/Tube, Pins=16, Radiation Hardening=No, REACH SVHC="No SVHC", RoHSCompliant=true, Weight="0.03357 oz", Width="0.25 inch"
Q1: "High Density Mounting Type Photocoupler", Package=None, Availability=Unavailable, MF="{'manufacturer': u'Sharp Corporation'}", MP=PC817C, Price=None
R1: JLCPCB Part Class="Extended Part", LCSC Part Name="10Ω 电阻精度:±20% 2800K", Manufacturer=时恒, Manufacturer Part="MF72 10D7", Operating Temperature=-40℃~+130℃, Steady State Current (Max)=1A, Add into BOM=yes, B Constant (25℃/75℃)=-, B Constant (25℃/85℃)=-, B Constant (25℃/100℃)=-, Convert to PCB=yes, Datasheet=https://atta.szlcsc.com/upload/public/pdf/source/20231113/55BE817FC059D652AE7104DE5FB0A908.pdf, Device="MF72 10D7_C72680", Supplier=LCSC, Supplier Footprint=插件,P=5mm, Supplier Part=C72680, Symbol=MF72-10D7
R2: JLCPCB Part Class="Extended Part", LCSC Part Name="钳位电压920V 42.3焦耳 插件压敏电阻", Manufacturer=RUILON(瑞隆源), Manufacturer Part=10D561K, Varistor Voltage=504V~616V, Add into BOM=yes, Convert to PCB=yes, Datasheet=https://atta.szlcsc.com/upload/public/pdf/source/20180619/C233186_9A7AF57C0A178A4DEED9AC3F9621CA64.pdf, Device=10D561K_C233178, Maximum Energy=42.3J, Supplier=LCSC, Supplier Footprint=插件, Supplier Part=C233178, Symbol=10D561K_C233178, Typical Capatitance=180pF@1kHz
R3: library part CMP-03212-000008-1, "RES 100K OHM 5% 1W AXIAL", Case/Package=Metal, Max Operating Temperature=155°C, Min Operating Temperature=-55°C, Number of Resistors=1, Package Quantity=5000, Power Rating=1W, Resistance=100kR, Resistor Type="Power resistor", Temperature Coefficient=300ppm/°C, Tolerance=5%, Voltage Rating=350V, Diameter=2.6mm, ELV=Compliant, Length=6.8mm, Mount=Axial, Number of Terminations=2, Packaging="Ammo Pack", RoHS Compliant=Yes, Series=RR, Termination=Axial
R4 R5 R6 R7 R8: library part "CF1/4W-2.2KΩ±5% T", JLCPCB Part Class="Extended Part", LCSC Part Name="2.2kΩ ±5% 250mW 碳膜电阻", Manufacturer=CCO(千志电子), Operating Temperature Range=-55℃~+155℃, Overload Voltage (Max)=250V, Power(Watts)=250mW, Temperature Coefficient=±350ppm/℃, Tolerance=±5%, Add into BOM=yes, Convert to PCB=yes, Datasheet=https://atta.szlcsc.com/upload/public/pdf/source/20190910/C427328_A0A2D65F3FD547937F4E674C90868175.pdf, Device="CF1/4W-2.2KΩ±5% T", Manufacturer Part="CF1/4W-2.2KΩ±5% T", Supplier=LCSC, Supplier Footprint=插件,D2.3xL6.5mm, Supplier Part=C120063, Symbol="CF1/4W-2.2KΩ±5% T52", Type="Carbon Resister"
U1: library part KF127-5.0-2P, Color=Green, Current Rating (Max)=15A, JLCPCB Part Class="Extended Part", LCSC Part Name="5mm 1x2P 排数:1 每排P数:2 直插", Manufacturer=KEFA(科发), Operating Temperature Range=-40℃~+105℃, Voltage Rating (Max)=250V, Add into BOM=yes, Convert to PCB=yes, Datasheet=https://atta.szlcsc.com/upload/public/pdf/source/20230317/A76A1969A1719ACA3DDCF692059F3CA5.pdf, Device=KF127-5.0-2P, Manufacturer Part=KF127-5.0-2P, Mounting Style=Straight, Number of Pins=2P, Number of PINs Per Row=2, Number of Rows=1, Pitch=5mm, Structure=1x2P, Supplier=LCSC, Supplier Footprint=插件,P=5mm, Supplier Part=C474904, Symbol=KF127-5.0-2P, Wire Gauge - AWG=14~26, Wire Gauge - mm2=1.5
U2: JLCPCB Part Class="Extended Part", Manufacturer=DK(东科半导体), Add into BOM=yes, Convert to PCB=yes, Datasheet=https://atta.szlcsc.com/upload/public/pdf/source/20170523/1495534039933.pdf, Device=DK124, LCSC Part Name=DK124, Manufacturer Part=DK124, Supplier=LCSC, Supplier Footprint=DIP-8, Supplier Part=C78752, Symbol=DK124
U3: JLCPCB Part Class="Extended Part", Manufacturer=ZHOURI(洲日), Add into BOM=yes, Convert to PCB=yes, Datasheet=https://atta.szlcsc.com/upload/public/pdf/source/20221111/941C48A64A881023E1ECD9BB647261A0.pdf, Device=XH-2PA, LCSC Part Name=XH-2PA, Manufacturer Part=XH-2PA, Supplier=LCSC, Supplier Footprint=插件,P=2.5mm, Supplier Part=C5258883, Symbol=XH-2PA
U4: library part WH06-2C-102(1K), JLCPCB Part Class="Extended Part", LCSC Part Name="1kΩ ±25%", Manufacturer=BOCHEN(博晨), Tolerance=±25%, Add into BOM=yes, Convert to PCB=yes, Datasheet=https://atta.szlcsc.com/upload/public/pdf/source/20221019/683A1EE763180882FA5E0C1228474CEE.pdf, Device=WH06-2C-102(1K), Manufacturer Part=WH06-2C-102(1K), Supplier=LCSC, Supplier Footprint=插件, Supplier Part=C5205040, Symbol=WH06-2C-102(1K)
U5: library part CMP-0242-00003-1, "Programmable Voltage Reference, 2.5 to 36V, 3-Pin TO-92, Ammopak", ComponentLink1Description="Manufacturer URL", ComponentLink1URL=http://www.st.com, ComponentLink2Description=Datasheet, ComponentLink2URL=http://www.st.com/internet/com/TECHNICAL_RESOURCES/TECHNICAL_LITERATURE/DATASHEET/CD00000986.pdf, DatasheetVersion=Oct-2011, PackageDescription="TO, Flat Index; 3 In-Line, Axial Leads; Body Dia. 4.7mm; Lead Dia. 0.56 mm (max)", PackageReference=TO-92, PackageVersion=2011

## Nets (pads, with @x,y where several pads share a name; then routed paths per layer and width w, separated by ;. In a path a pad name is that pad's centre, name@x,y a point inside that pad or via, vN(x,y) a via of type N, cw(c..) or ccw(c..) an arc to the next point about the centre after c; other vN are vias at no path point)
+12V1: C7.2 C8.2 D1.1 L2.1 R4.2 | length 2838.5
  Layer 2 w60: D1.1 2185,4700 2415,4470 C7.2 C8.2 3178.95,4305.24 L2.1 ; R4.2 1990.94,3460.94 2170,3640 2170,4155 2320,4305 C7.2@2415,4305
+12V2: C5.2 C6.2 L2.2 R5.2 R6.2 U3.1 | length 3043.4
  Layer 2 w60: R5.2 2620,3603.58 ; C5.2 2620,3600 2950,3600 3049.21,3699.21 C6.2 3230,3780 3295,3845 3295,3992.34 3288.27,3999.06 ; U3.1 2651.5,4498.5 2750,4400 3255,4400 3425,4230 3425,4009.06 3435,3999.06 ; L2.2 3288.27,3999.06 ; R6.2 3435,3999.06 ; 3288.27,3999.06 3435,3999.06
DC: C4.2 R3.2 T1.4
DC: BR1.1 C3.P | length 485
  Top Layer w60: BR1.1 3217.4,1640.15 3252.55,1605 3617.64,1605 C3.P
GND1: BR1.2 C1.1 C3.N C9.1 C11.2 U2.1 U2.2 | length 420.3
  Top Layer w60: C3.N 4069.29,1932.64 C1.1
GND2: C1.2 C5.1 C6.1 C7.1 C8.1 D3.1 T1.5 T1.6 U3.2 U4.1 U5.2 | length 2033.3
  Top Layer w60: U4.1 3300,2400 3890,2400 4070,2220 C1.2
  Layer 2 w60: U3.2 2750,4575 2835,4490 3395,4490
NetBR1_3: BR1.3 L1.2 | length 268.9
  Top Layer w60: L1.2 2855.16,1927.83 2892.6,1890.39 BR1.3
NetBR1_4: BR1.4 L1.3 | length 259.5
  Top Layer w60: L1.3 2857.45,1612.87 2892.6,1648.02 BR1.4
NetC2_1: C2.1 F1.2 R1.1 R2.2 | length 1433
  Top Layer w60: F1.2 1514.31,2354.88 1589.2,2280 R1.1 1590,1920 1677.64,1832.36 R2.2 1972.36,1832.36 2070,1930 C2.1
NetC2_2: C2.2 L1.4 R2.1 U1.1
NetC4_1: C4.1 D2.C R3.1
NetC9_2: C9.2 Q1.4 U2.4 | length 603.2
  Top Layer w60: U2.4 2394.13,2772.87 2432,2735 C9.2 2560,2515 Q1.4
NetC10_1: C10.1 Q1.2 R7.1 U5.1 | length 1813.6
  Top Layer w20: U5.1 2960,2675
  Top Layer w60: Q1.2 2965,2365 3005,2405 3005,2630 2960,2675
  Layer 2 w20: 2760,2675 U5.1
  Layer 2 w60: R7.1 2247.56,3457.44 2310,3395 2310,3055 2440,2925 2659.85,2925 2695,2889.85 2695,2740 2760,2675
NetC10_2: C10.2 R8.1 U4.3 U5.3 | length 646
  Top Layer w20: U5.3 2945,2775
  Top Layer w60: 2945,2775 3099.93,2775 3109.93,2785 U4.3
  Layer 2 w60: R8.1 2752.44,3037.56 2860,2930 U5.3@2860,2785.31
NetC11_1: C11.1 Q1.3 U2.3 | length 538.8
  Top Layer w60: U2.3 2332.13,2672.87 2435,2570 2435,2460 2530,2365 Q1.3
NetD1_2: D1.2 T1.7 T1.8 | length 325.9
  Layer 2 w60: T1.8 1427.01,4377.01 1427.01,4699.8 D1.2
NetD2_A: D2.A T1.1 U2.5 U2.6 U2.7 U2.8 | length 1720.6
  Top Layer w60: U2.8 U2.7 U2.6 U2.5 1822.13,2772.87 1675,2920 D2.A 1675,3405 1855,3585 1960,3585 2025,3650 T1.1
NetD3_2: D3.2 R6.1 | length 344.4
  Layer 2 w60: 3400,4560 3575,4560 3627.64,4507.36 R6.1
NetF1_1: F1.1 U1.2 | length 381.3
  Top Layer w100: U1.2 F1.1@1247.37,1462.48
NetL1_1: L1.1 R1.2 | length 861.1
  Top Layer w60: R1.2 1941.85,2235 2205,2235 2388.62,2051.38 L1.1
NetQ1_1: Q1.1 R4.1 R7.2 | length 1255.1
  Layer 2 w60: R4.1@1958.38,3046.54 2153.12,3046.54 R7.2@2156.62,3043.04 ; R7.2 2168.89,3044.06 2425,2787.96 2425,2680 2540,2565 2810,2565 Q1.1
NetR5_1: R5.1 R8.2 | length 494.1
  Layer 2 w60: R5.1 2467.36,3137.36 2662.36,3332.36 R8.2
pads on no net: T1.2 T1.3 T1.9 U4.2

## Polygon pours and split planes (outlines as drawn)
GND1 on Bottom Layer "GND 01" (solid, remove dead copper, pour order 0): 1040,1150 1170,1020 3920,1020 4175,1275 4175,4330 3575,4930 1485,4930 1045,4490
GND2 on Layer 1 "GND 02" (solid, remove dead copper, pour order 1): 1040,1150 1170,1020 3920,1020 4175,1275 4175,4330 3575,4930 1485,4930 1045,4490
NetC4_1 on Top Layer "NONET_L-01_P-001" (solid, remove dead copper, pour order 5): 1110,2725 1080,2665 1080,2580 1130,2530 1680,2530 1750,2600 1750,2695 1715,2730 1112.5,2730
DC on Top Layer "NONET_L-01_P-001" (solid, remove dead copper, pour order 4): 1040,3030 1135,2935 1450,2935 1550,3035 1550,3510 1325,3735 1325,3835 1290,3870 1080,3870 1040,3830
NetC2_2 on Top Layer "NONET_L-01_P-001" (solid, remove dead copper, pour order 2): 1410,1020 1365,1065 1365,1470 1575,1680 2395,1680 2475,1600 2475,1380 2115,1020

## Text inside footprints (layer, text, board x,y; h text height)
C10: Top Overlay "+" at -49879.92,-47729.68 h39.37